# EAGLE board GAIN_BOARD (EAGLE 7.6.0)
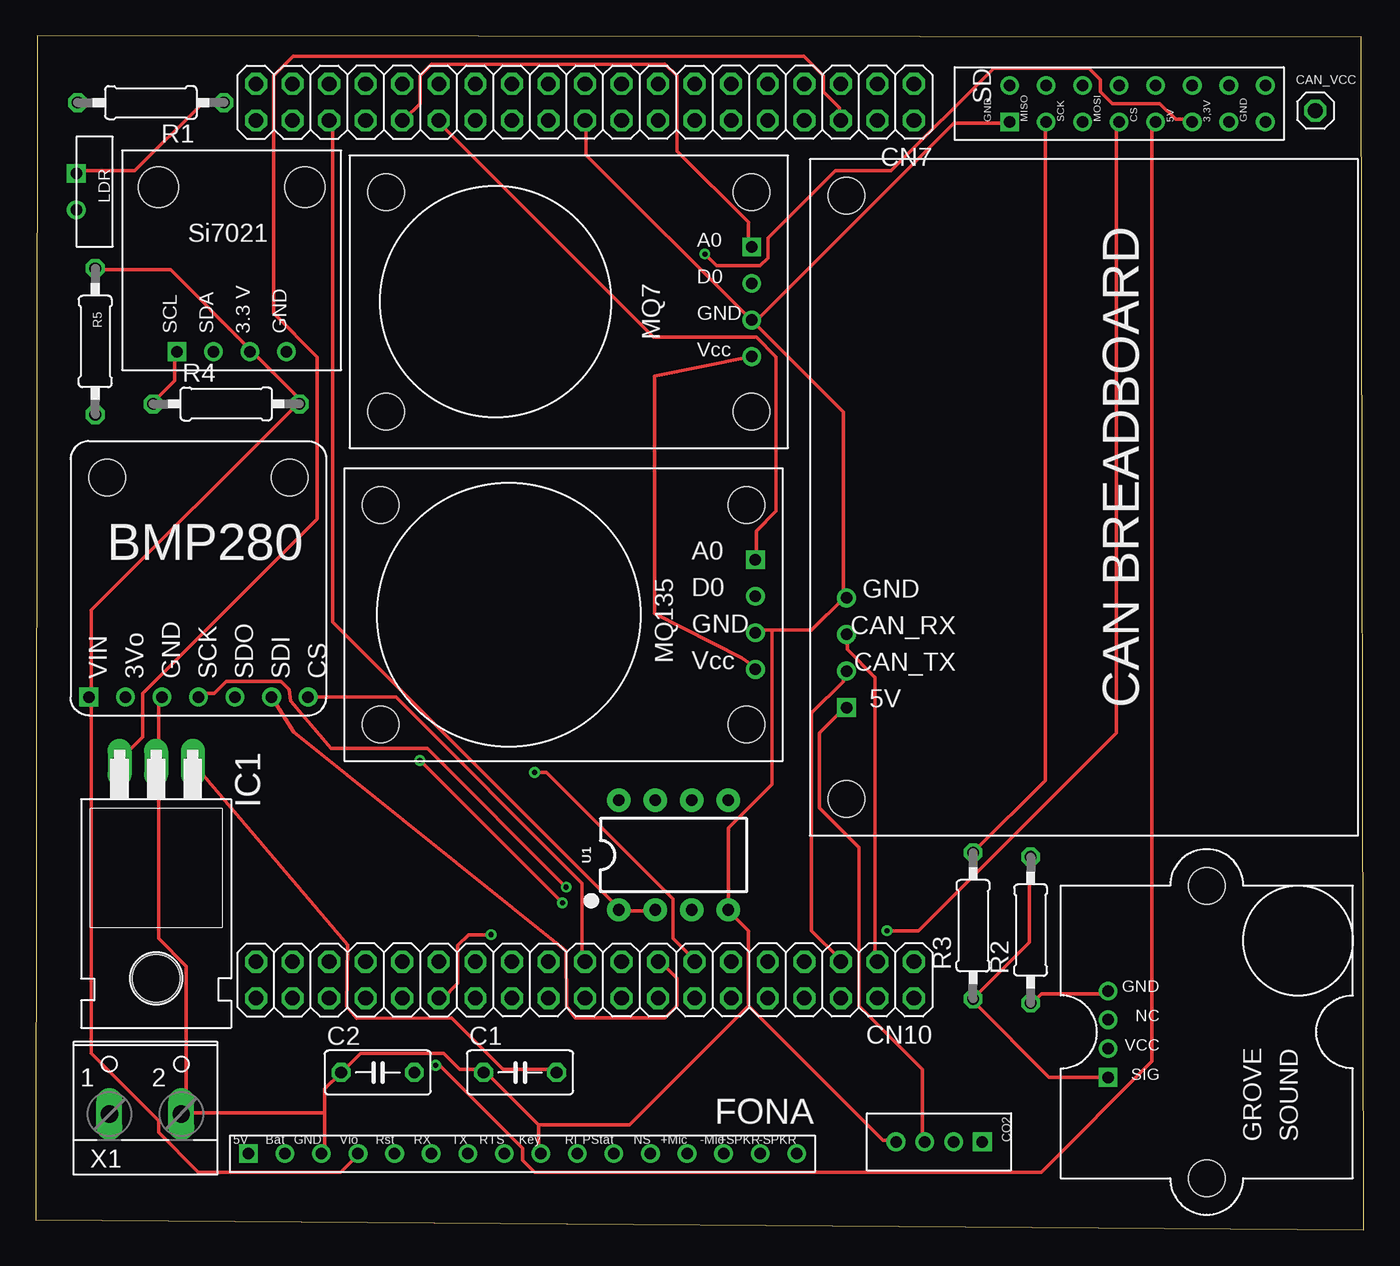
[diagram p0: board, top side]
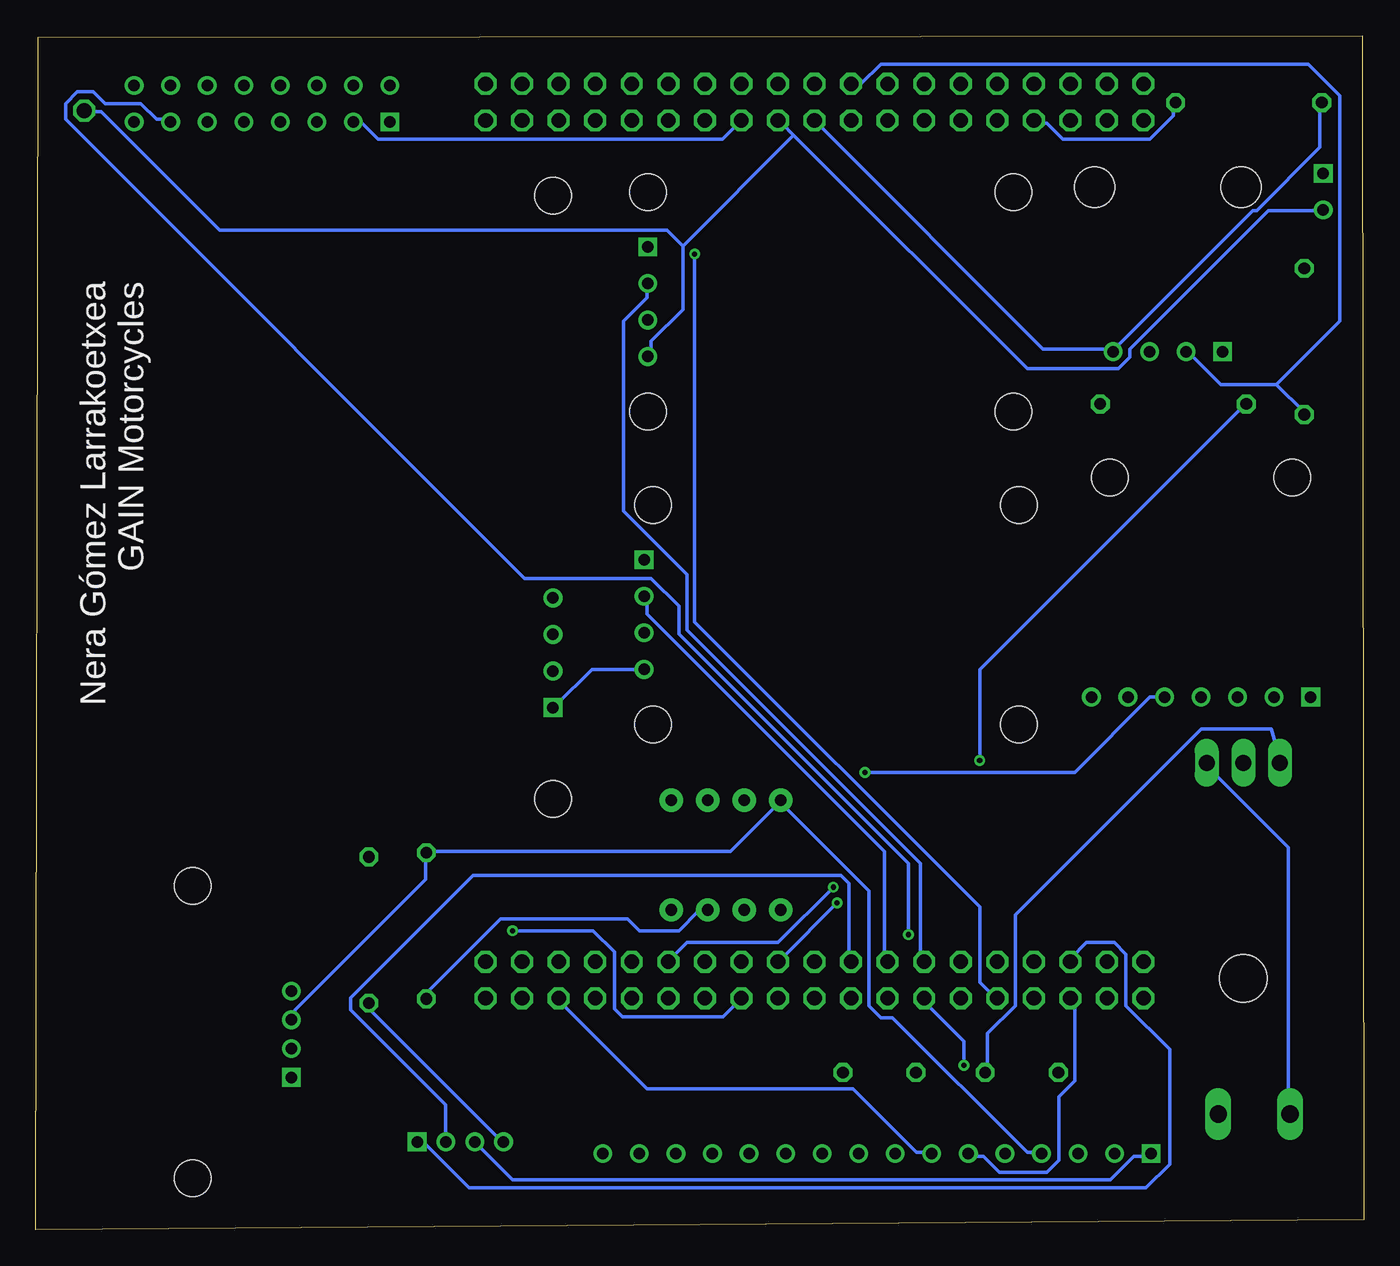
[diagram p1: board, bottom side, seen from below]

Size 92.25 x 82.95 mm. Coordinates in mm from the lower left corner, seen from the top.
Outline: 0,0.7 92.25,0 92.1,82.85 0.1,82.95 0,0.7
Copper layers (1*16): Top 0.105mm / dielectric 1.55mm / Bottom 0.105mm
Design rules "eC_2Layer_PClass3_BaseCopperO105": minimum track width 0.25mm, minimum drill 0.35mm, track to track 0.3mm, track to pad 0.3mm, pad to pad 0.3mm, via to via 0.3mm, smd to smd 0mil, copper to edge 0.25mm, drill to drill 0.35mm, minimum pad ring 0.25mm, minimum via ring 0.2mm, stop-mask expansion 0mil, vias tented up to drill 0.45mm, thermal gap 0.2mm

## Footprints (pad centres in the part's own frame; a part is rotated, then mirrored left to right if it is on the bottom)
C050-030X075 = drill 0.813 octagon: 1 -2.54,0; 2 2.54,0
1X01 = drill 1.016 octagon: 1 0,0
2X19 = drill 1.016 octagon: 1 -22.86,-1.27; 2 -22.86,1.27; 3 -20.32,-1.27; 4 -20.32,1.27; 5 -17.78,-1.27; 6 -17.78,1.27; 7 -15.24,-1.27; 8 -15.24,1.27; 9 -12.7,-1.27; 10 -12.7,1.27; 11 -10.16,-1.27; 12 -10.16,1.27; 13 -7.62,-1.27; 14 -7.62,1.27; 15 -5.08,-1.27; 16 -5.08,1.27; 17 -2.54,-1.27; 18 -2.54,1.27; 19 0,-1.27; 20 0,1.27; 21 2.54,-1.27; 22 2.54,1.27; 23 5.08,-1.27; 24 5.08,1.27; 25 7.62,-1.27; 26 7.62,1.27; 27 10.16,-1.27; 28 10.16,1.27; 29 12.7,-1.27; 30 12.7,1.27; 31 15.24,-1.27; 32 15.24,1.27; 33 17.78,-1.27; 34 17.78,1.27; 35 20.32,-1.27; 36 20.32,1.27; 37 22.86,-1.27; 38 22.86,1.27
TO220H = drill 1.118 long: 1 -2.54,-10.16; 2 0,-10.16; 3 2.54,-10.16 | hole 3.302: 0,4.826
0207/10 = drill 0.813 octagon: 1 -5.08,0; 2 5.08,0
DIP08 = drill 0.813 pad 1.626: 1 -3.81,-3.81; 2 -1.27,-3.81; 3 1.27,-3.81; 4 3.81,-3.81; 5 3.81,3.81; 6 1.27,3.81; 7 -1.27,3.81; 8 -3.81,3.81
MQ135 = drill 0.8 square: P$1 6.35,28.575 | drill 0.8: P$2 8.89,28.575; P$3 11.43,28.575; P$4 13.97,28.575 | hole 2.54: 17.78,27.94; 2.54,27.94; 2.54,2.54; 17.78,2.54
MQ7 = drill 0.8 square: P$1 6.35,27.94 | drill 0.8: P$2 8.89,27.94; P$3 11.43,27.94; P$4 13.97,27.94 | hole 2.54: 2.54,27.94; 17.78,27.94; 17.78,2.54; 2.54,2.54
LDR = drill 0.8 square: P$1 2.54,0 | drill 0.8: P$2 5.08,0
GROVE_SOUND = drill 0.8 square: P$1 7,17 | drill 0.8: P$2 9,17; P$3 11,17; P$4 13,17 | hole 2.54: 0,10.16; 20.32,10.16
BMP280 = drill 0.8 square: P$1 1.27,1.27 | drill 0.8: P$2 3.81,1.27; P$3 6.35,1.27; P$4 8.89,1.27; P$5 11.43,1.27; P$6 13.97,1.27; P$7 16.51,1.27 | hole 2.54: 2.54,16.51; 15.24,16.51
SD_CARD = drill 0.8 square: P$1 1.27,22.86 | drill 0.8: P$2 1.27,20.32; P$3 1.27,17.78; P$4 1.27,15.24; P$5 1.27,12.7; P$6 1.27,10.16; P$7 1.27,7.62; P$8 1.27,5.08; P$9 3.81,22.86; P$10 3.81,20.32; P$11 3.81,17.78; P$12 3.81,15.24; P$13 3.81,12.7; P$14 3.81,10.16; P$15 3.81,7.62; P$16 3.81,5.08
CAN_BREAKBOARD = drill 0.8 square: P$1 8.89,35.56 | drill 0.8: P$2 11.43,35.56; P$3 13.97,35.56; P$4 16.51,35.56 | hole 2.54: 2.54,35.56; 44.45,35.56
SI7021 = drill 0.8 square: P$1 3.81,1.27 | drill 0.8: P$2 6.35,1.27; P$3 8.89,1.27; P$4 11.43,1.27 | hole 2.794: 12.7,12.7; 2.54,12.7
FONA = drill 0.8 square: P$1 0,0 | drill 0.8: P$2 2.54,0; P$3 5.08,0; P$4 7.62,0; P$5 10.16,0; P$6 12.7,0; P$7 15.24,0; P$8 17.78,0; P$9 20.32,0; P$10 22.86,0; P$11 25.4,0; P$12 27.94,0; P$13 30.48,0; P$14 33.02,0; P$15 35.56,0; P$16 38.1,0
CO2_GROVE = drill 0.8 square: P$1 2,2 | drill 0.8: P$2 2,4; P$3 2,6; P$4 2,8
W237-102 = drill 1.194 long: 1 -2.5,-1.27; 2 2.5,-1.27

## Placement (x,y rotation side)
C1  0.33 uF  [C050-030X075]  33.64,10.92 0 top
C2  0.1 uF  [C050-030X075]  23.75,10.92 0 top
CAN_VCC  CAN_VCC  [1X01]  88.9,77.76 0 top
CN7  CN7  [2X19]  38.15,78.35 180 top
CN10  CN10  [2X19]  38.15,17.35 180 top
IC1  7805T  [TO220H]  8.35,22.28 180 top
R1  330  [0207/10]  7.98,78.32 180 top
R2  47K  [0207/10]  69.12,20.82 90 top
R3  47K  [0207/10]  65.12,21.12 90 top
R4  10K  [0207/10]  13.22,57.38 0 top
R5  10K  [0207/10]  4.12,61.72 90 top
U1  LM358  [DIP08]  44.3,26.03 0 top
U$1  MQ135  [MQ135]  21.42,52.9 270 top
U$2  MQ7  [MQ7]  21.79,74.64 270 top
U$3  LDR  [LDR]  2.8,75.94 270 top
U$4  GROVE_SOUND  [GROVE_SOUND]  91.51,3.58 90 top
U$5  BMP280  [BMP280]  2.4,35.74 0 top
U$6  SD_CARD  [SD_CARD]  90.51,75.71 90 top
U$7  CAN_BREADBOARD  [CAN_BREAKBOARD]  91.88,27.39 90 top
U$8  SI7021  [SI7021]  5.98,59.74 0 top
U$9  FONA  [FONA]  14.76,5.28 0 top
U$10  CO2_GROVE  [CO2_GROVE]  67.76,4.1 90 top
X1  [W237-102]  7.6,9.3 0 top

## Library data of the parts
C1 C2 R1-R5 = resistor
CAN_VCC CN7 CN10 = pinhead
IC1 = linear
U1 = SparkFun-IC-Amplifiers; PROD_ID: IC-09172
U$1 = MQ135
U$2 = MQ7
U$3 = LDR
U$4 = GROVE_SOUND
U$5 = BMP280
U$6 = SD_CARD
U$7 = CAN_BREADBOARD
U$8 = Si7021
U$9 = FONA
U$10 = CO2_GROVE
X1 = con-wago-500; MPN: 237-102; OC_FARNELL: unknown; OC_NEWARK: 70K9898

## Nets
+3V3: CN7.16 R3.2 R4.2 R5.2 U1.8 U$4.P$3 U$5.P$1 U$6.P$2 U$8.P$3 U$9.P$4
+5V: CAN_VCC.1 CN7.18 U$1.P$4 U$2.P$4 U$3.P$2 U$7.P$1 U$9.P$1 U$10.P$3
A0: CN7.28 U$1.P$1
A1: CN7.30 U$2.P$1
A2: CN7.32 R1.1 U$3.P$1
A3: CN7.34 U1.1 U1.2
D2: CN10.33 U$10.P$1
D6: CN10.25 U$2.P$2
D7: CN10.23 U$1.P$2
D8: CN10.21 U$10.P$2
D9: CN10.19 U$5.P$7
D11: CN10.15 U$5.P$6
D12: CN10.13 U$5.P$5
D13: CN10.11 U$5.P$4
GND: C1.1 C2.1 CN7.20 IC1.2 R1.2 R2.1 U1.4 U$1.P$3 U$2.P$3 U$4.P$4 U$5.P$3 U$6.P$1 U$7.P$4 U$8.P$4 U$9.P$3 U$9.P$9 U$10.P$4 X1.2
N$2: R2.2 R3.1 U1.3 U$4.P$1
N$3: C1.2 IC1.1 X1.1
PB_6: CN10.17 R4.1 U$8.P$1
PB_7: CN7.21 R5.1 U$8.P$2
PB_8: CN10.3 U$7.P$3
PB_9: CN10.5 U$7.P$2
PB_12: CN10.16 U$6.P$4
PB_13: CN10.30 U$6.P$6
PB_14: CN10.28 U$6.P$7
PB_15: CN10.26 U$6.P$5
PC_4: CN10.34 U$9.P$6
PC_5: CN10.6 U$9.P$7
VCC: C2.2 CN7.6 IC1.3

## Tracks (layer width: path | path; a pad name or v marks a point on that pad's centre or on a via)
+3V3
  Top 0.25: R5.2 4.12,66.7 9.35,66.7 14.85,61.2 U$8.P$3 15.12,60.93 18.43,57.62 R4.2 18.15,57.35 3.85,43.05 3.85,37.28 U$5.P$1 3.85,37 3.85,12.25 8.53,7.58 8.53,6.75 11.28,4 21.18,4 22.27,5.1 U$9.P$4 | U$6.P$2 70.12,76.88 70.12,31.22 65.17,26.27 R3.2
  Bottom 0.25: U$6.P$2 70.12,76.88 69.58,76.88 68.47,75.78 44.55,75.78 43.45,76.88 CN7.16 | U$4.P$3 74.25,14.72 74.25,15.27 65.17,24.35 65.17,26 R3.2 64.9,26.27 44,26.27 40.7,29.57 U1.8 40.42,29.57 34.38,23.52 34.38,15.55 33.55,14.72 32.73,14.72 23.38,5.38 22.55,5.38 U$9.P$4
+5V
  Top 0.25: U$1.P$4 49.77,39.2 49.08,39.73 42.98,42.83 42.98,59.33 49.5,60.65 U$2.P$4 | U$10.P$3 61.6,6.2 61.6,11.15 57.2,15.55 57.2,26.55 54.45,29.3 54.45,34.53 56.1,36.18 U$7.P$1
  Bottom 0.25: U$9.P$1 14.85,5.1 15.95,5.1 17.6,3.45 59.12,3.45 61.6,5.92 U$10.P$3 | U$1.P$4 50.05,38.93 53.62,38.93 56.1,36.45 U$7.P$1 | 39.6,76.05 40.42,76.88 CN7.18 | 39.6,76.05 23.38,59.83 17.05,59.83 16.23,60.65 16.23,61.2 6.6,70.83 3.02,70.83 U$3.P$2 | 47.3,68.35 47.3,63.95 49.5,61.75 49.5,60.93 U$2.P$4 | 39.6,76.05 47.3,68.35 | 47.3,68.35 48.4,69.45 79.47,69.45 87.72,77.7 88.83,77.7 CAN_VCC.1
A0
  Top 0.25: U$1.P$1 50.05,46.62 50.05,48.55 51.42,49.93 51.42,60.65 50.05,62.03 42.9,62.03 28.05,76.88 CN7.28
A1
  Top 0.25: U$2.P$1 49.5,68.35 49.5,70 44.55,74.95 44.55,80.17 43.73,81 27.5,81 26.68,80.17 26.68,78.25 25.57,77.15 CN7.30
A2
  Top 0.25: U$3.P$1 3.02,73.58 6.88,73.58 11.55,78.25 12.93,78.25 R1.1
  Bottom 0.25: CN7.32 22.82,76.88 22,76.88 20.9,75.78 14.85,75.78 13.2,77.42 13.2,78.25 R1.1
A3
  Top 0.25: CN7.34 20.62,76.88 20.62,42.23 40.42,22.43 U1.1 40.7,22.15 42.9,22.15 U1.2
D2
  Bottom 0.25: U$10.P$1 65.72,5.92 65.17,5.92 62.15,2.9 15.12,2.9 13.47,4.55 13.47,12.52 16.5,15.55 16.5,19.12 17.32,19.95 19.25,19.95 20.35,18.85 CN10.33
D6
  Bottom 0.25: U$2.P$2 49.77,65.6 49.77,64.78 51.42,63.12 51.42,49.93 47.02,45.53 47.02,41.68 30.8,25.45 30.8,18.85 CN10.25
D7
  Bottom 0.25: U$1.P$2 49.77,43.88 49.77,42.78 33.27,26.27 33.27,18.85 CN10.23
D8
  Bottom 0.25: U$10.P$2 63.8,6.2 63.8,8.67 70.4,15.27 70.4,16.1 61.88,24.62 36.3,24.62 35.75,24.07 35.75,18.85 CN10.21
D9
  Top 0.25: U$5.P$7 18.98,37 25.02,37 37.95,24.07 37.95,18.85 CN10.19
D11
  Top 0.25: 36.88,15.55 36.83,19.38 17.9,34.6 U$5.P$6 | 43.73,14.72 44.55,15.55 44.55,17.47 43.45,18.57 CN10.15
  Top 0.254: 43.73,14.72 37.45,14.72 36.88,15.55
D12  (via drill 0.35)
  Top 0.25: v34.65,31.77 35.48,31.77 44.27,22.97 44.27,20.22 45.65,18.85 CN10.13
  Bottom 0.25: v34.65,31.77 20.07,31.77 14.85,37 14.03,37 U$5.P$5
D13  (via drill 0.35)
  Top 0.25: 20.5,33.43 17.7,36.73 17.6,37.55 17.05,38.1 13.2,38.1 12.38,37.28 11.55,37.28 U$5.P$4 | v36.85,23.8 27.23,33.43
  Top 0.254: 27.23,33.43 20.5,33.43
  Bottom 0.25: v36.85,23.8 40.7,19.95 47.02,19.95 48.12,18.85 CN10.11
GND
  Top 0.25: U$2.P$3 49.5,63.4 38.23,74.67 38.23,76.88 CN7.20 | U$6.P$1 67.65,76.88 63.8,76.88 50.33,63.4 49.77,63.4 U$2.P$3 | 34.92,7.3 34.92,5.38 U$9.P$9 | 34.92,7.3 31.35,10.88 C1.1 31.07,11.15 29.43,11.15 28.32,12.25 22.55,12.25 21.45,11.15 C2.1 21.18,10.88 20.07,9.77 20.07,8.12 | U$5.P$3 8.53,37 8.53,32.6 IC1.2 8.53,32.33 8.53,20.22 10.45,18.3 10.45,8.12 | 20.07,8.12 20.07,5.38 U$9.P$3 | 20.07,8.12 10.45,8.12 | 10.45,8.12 10.18,8.12 X1.2 10.45,8.12 | U$4.P$4 74.25,16.38 69.85,16.38 69.3,15.82 R2.1 | 51.15,41.68 53.9,41.68 56.1,43.88 U$7.P$4 56.1,44.15 56.1,56.8 49.77,63.12 U$2.P$3 | 51.15,41.68 50.05,41.68 U$1.P$3 | 51.15,41.68 51.15,30.95 48.12,27.93 48.12,22.43 U1.4 48.12,22.15 49.5,20.77 49.5,15.55 | 49.5,15.55 58.85,6.2 59.67,6.2 U$10.P$4 | 34.92,7.3 41.25,7.3 49.5,15.55
  Bottom 0.25: R1.2 3.02,78.25 3.02,75.23 7.42,70.83 7.7,70.83 17.32,61.2 U$8.P$4 17.6,61.2 22.27,61.2 37.95,76.88 CN7.20 | U$10.P$4 59.95,6.2 69.3,15.55 R2.1
N$2
  Top 0.25: U$4.P$1 74.25,10.6 70.4,10.6 65.17,15.82 R3.1 65.17,16.1 69.03,19.95 69.03,25.72 R2.2
  Bottom 0.25: U1.3 45.65,22.15 46.2,22.15 47.58,20.77 50.33,20.77 51.15,21.6 59.95,21.6 64.9,16.65 64.9,16.1 R3.1
N$3
  Top 0.25: C1.2 36.02,11.15 32.45,11.15 28.88,14.72 22.27,14.67 21.6,15.5 21.65,19.77 11,32.33 IC1.1
  Bottom 0.25: X1.1 5.22,8.12 5.22,26.55 11,32.33 IC1.1
PB_6  (via drill 0.35)
  Top 0.25: U$8.P$1 9.62,60.93 9.62,59 8.25,57.62 R4.1 | v26.68,32.6 v36.58,22.7
  Bottom 0.25: v36.58,22.7 40.42,18.85 CN10.17 | v26.68,32.6 26.68,38.93 8.25,57.35 R4.1
PB_7
  Bottom 0.25: 6.05,58.73 9.9,58.73 12.1,60.93 U$8.P$2 | 6.05,58.73 4.12,56.8 R5.1 | 6.05,58.73 1.65,63.12 1.65,78.8 3.85,81 33.55,81 34.92,79.62 35.48,79.62 CN7.21
PB_8
  Top 0.25: U$7.P$3 56.38,41.12 56.38,40.3 58.3,38.38 58.3,18.85 CN10.3
PB_9
  Top 0.25: U$7.P$2 56.1,38.65 56.1,38.1 53.9,35.9 53.9,20.77 55.83,18.85 CN10.5
PB_12  (via drill 0.35)
  Top 0.25: v59.12,20.77 61.33,20.77 75.08,34.53 75.08,76.88 U$6.P$4
  Bottom 0.254: v59.12,20.77 53.52,20.77 52.05,19.3 52.05,15.35 51.5,14.8 44.51,14.8 CN10.16
PB_13  (via drill 0.35)
  Top 0.25: v46.48,67.8 47.3,66.98 50.33,66.98 50.88,67.53 50.88,68.9 55.55,73.58 59.4,73.58 66.55,80.73 73.15,80.73 73.97,79.9 73.97,79.08 74.8,78.25 78.1,78.25 79.2,77.15 80.3,77.15 U$6.P$6
  Bottom 0.25: v46.48,67.8 46.48,42.23 26.68,22.43 26.68,17.2 25.57,16.1 CN10.30
PB_14  (via drill 0.35)
  Top 0.254: CN10.28 28.28,16.08 29.3,17.1 29.3,19.75 30.05,20.5 v31.62,20.5
  Bottom 0.25: v31.62,20.5 31.62,25.45 47.58,41.4 47.58,43.33 49.5,45.25 58.3,45.25 90.2,77.15 90.2,78.25 89.38,79.08 88.28,79.08 87.45,78.25 84.97,78.25 83.88,77.15 83.05,77.15 U$6.P$7
PB_15  (via drill 0.35)
  Top 0.25: v27.77,11.42 28.05,11.42 33.83,5.65 33.83,4.83 34.65,4 69.85,4 77.55,11.7 77.55,76.88 U$6.P$5
  Bottom 0.25: v27.77,11.42 27.77,13.07 30.52,15.82 CN10.26
PC_4
  Bottom 0.25: U$9.P$6 27.23,5.1 26.4,5.1 25.3,4 22,4 21.18,4.83 21.18,9.22 20.07,10.32 20.07,15.55 20.35,15.82 CN10.34
PC_5
  Bottom 0.25: U$9.P$7 30.25,5.38 31.07,5.38 35.48,9.77 49.77,9.77 55.83,15.82 CN10.6
VCC
  Top 0.25: CN7.6 55.83,77.15 55.83,77.98 54.73,79.08 54.73,80.17 53.35,81.55 17.88,81.55 16.5,80.17 16.5,63.68 19.52,60.65 19.52,49.38 7.42,37.28 7.42,34.25 5.78,32.6 IC1.3
  Bottom 0.25: C2.2 26.12,11.15 26.12,13.62 24.2,15.55 24.2,21.88 11.28,34.8 6.42,34.8 5.78,32.6 IC1.3

## Text on the board
tPlace: LDR | FONA
bPlace: Nera Gómez Larrakoetxea / GAIN Motorcycles